# Altium PCB UAC_V1_1.PcbDoc
Units mm, origin at the board's own origin, x right, y up, seen from the top; angles counter-clockwise.
Board outline 33.91 x 48.01 mm, 4 copper layers (Top Layer, Int1, Int2, Bottom Layer), stack 1.369 mm thick; 71 components, 45 nets, 264 pads, 49 vias.
Unrouted connection lines stored in the file: 3.
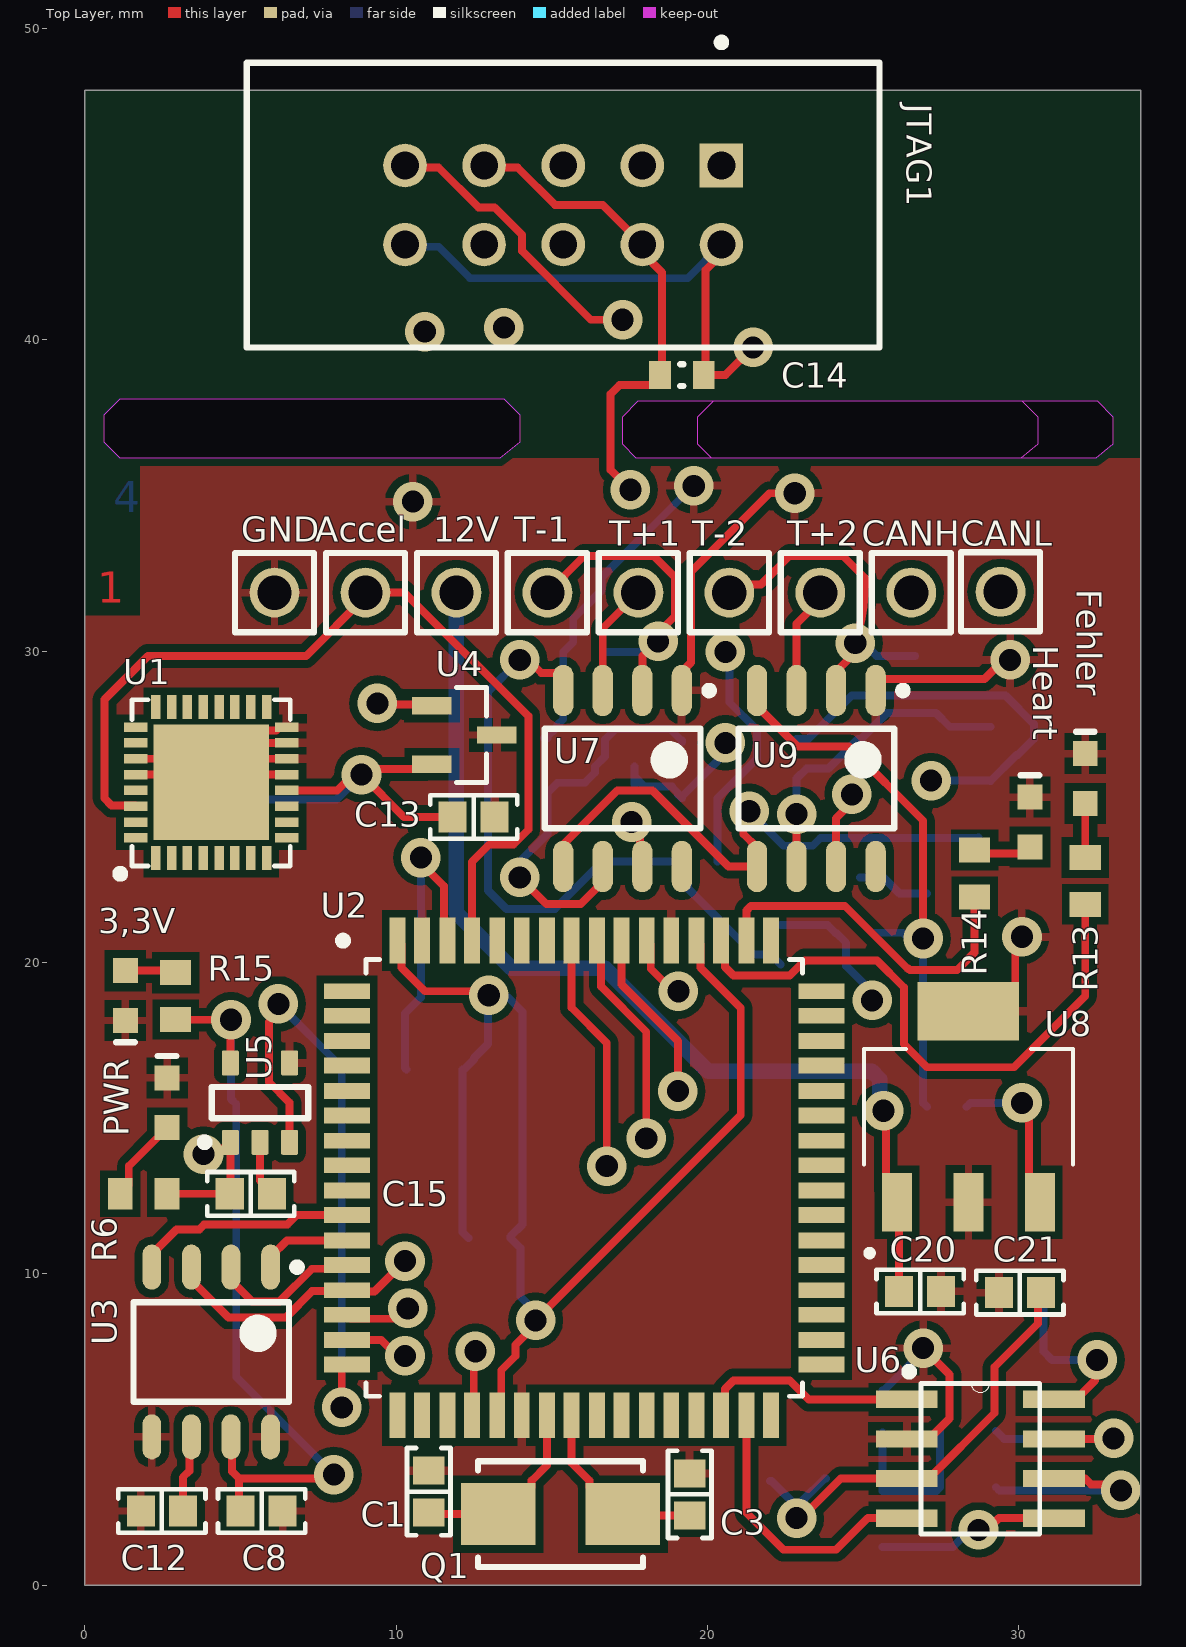
[diagram p0: Top Layer view]
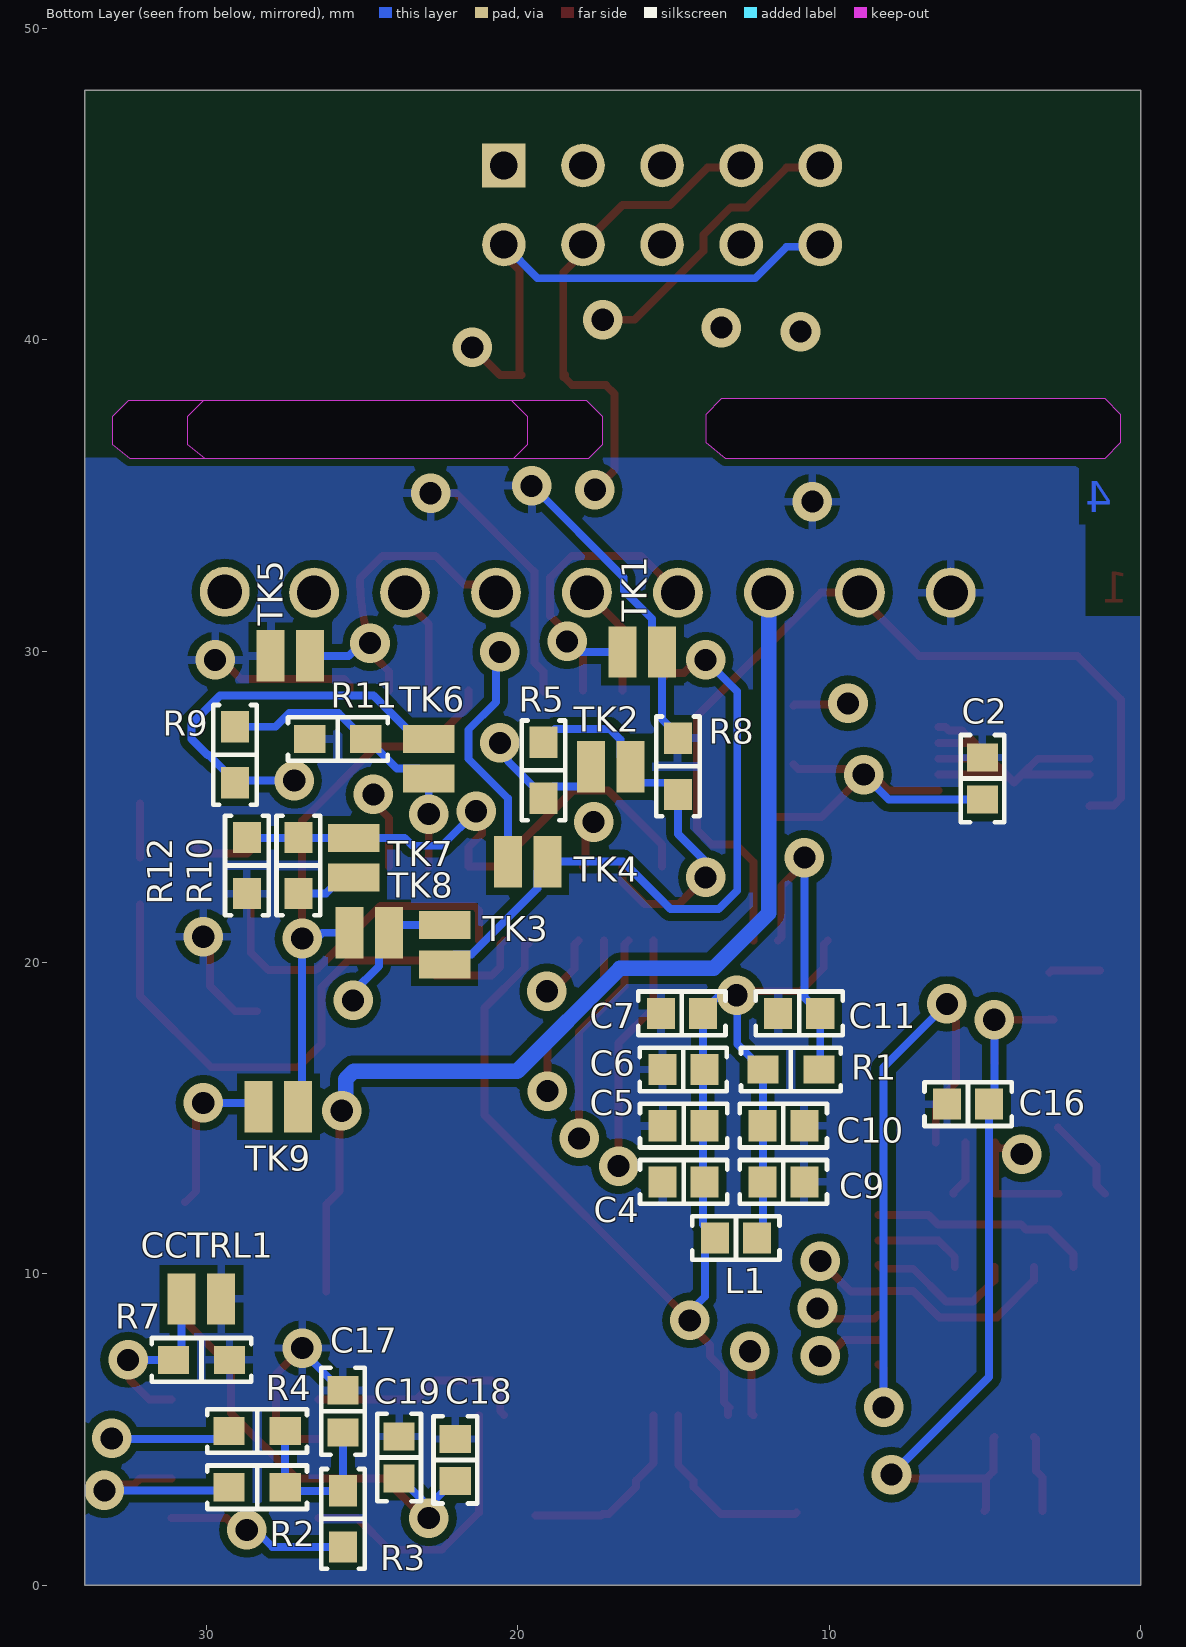
[diagram p1: Bottom Layer view, seen from below]
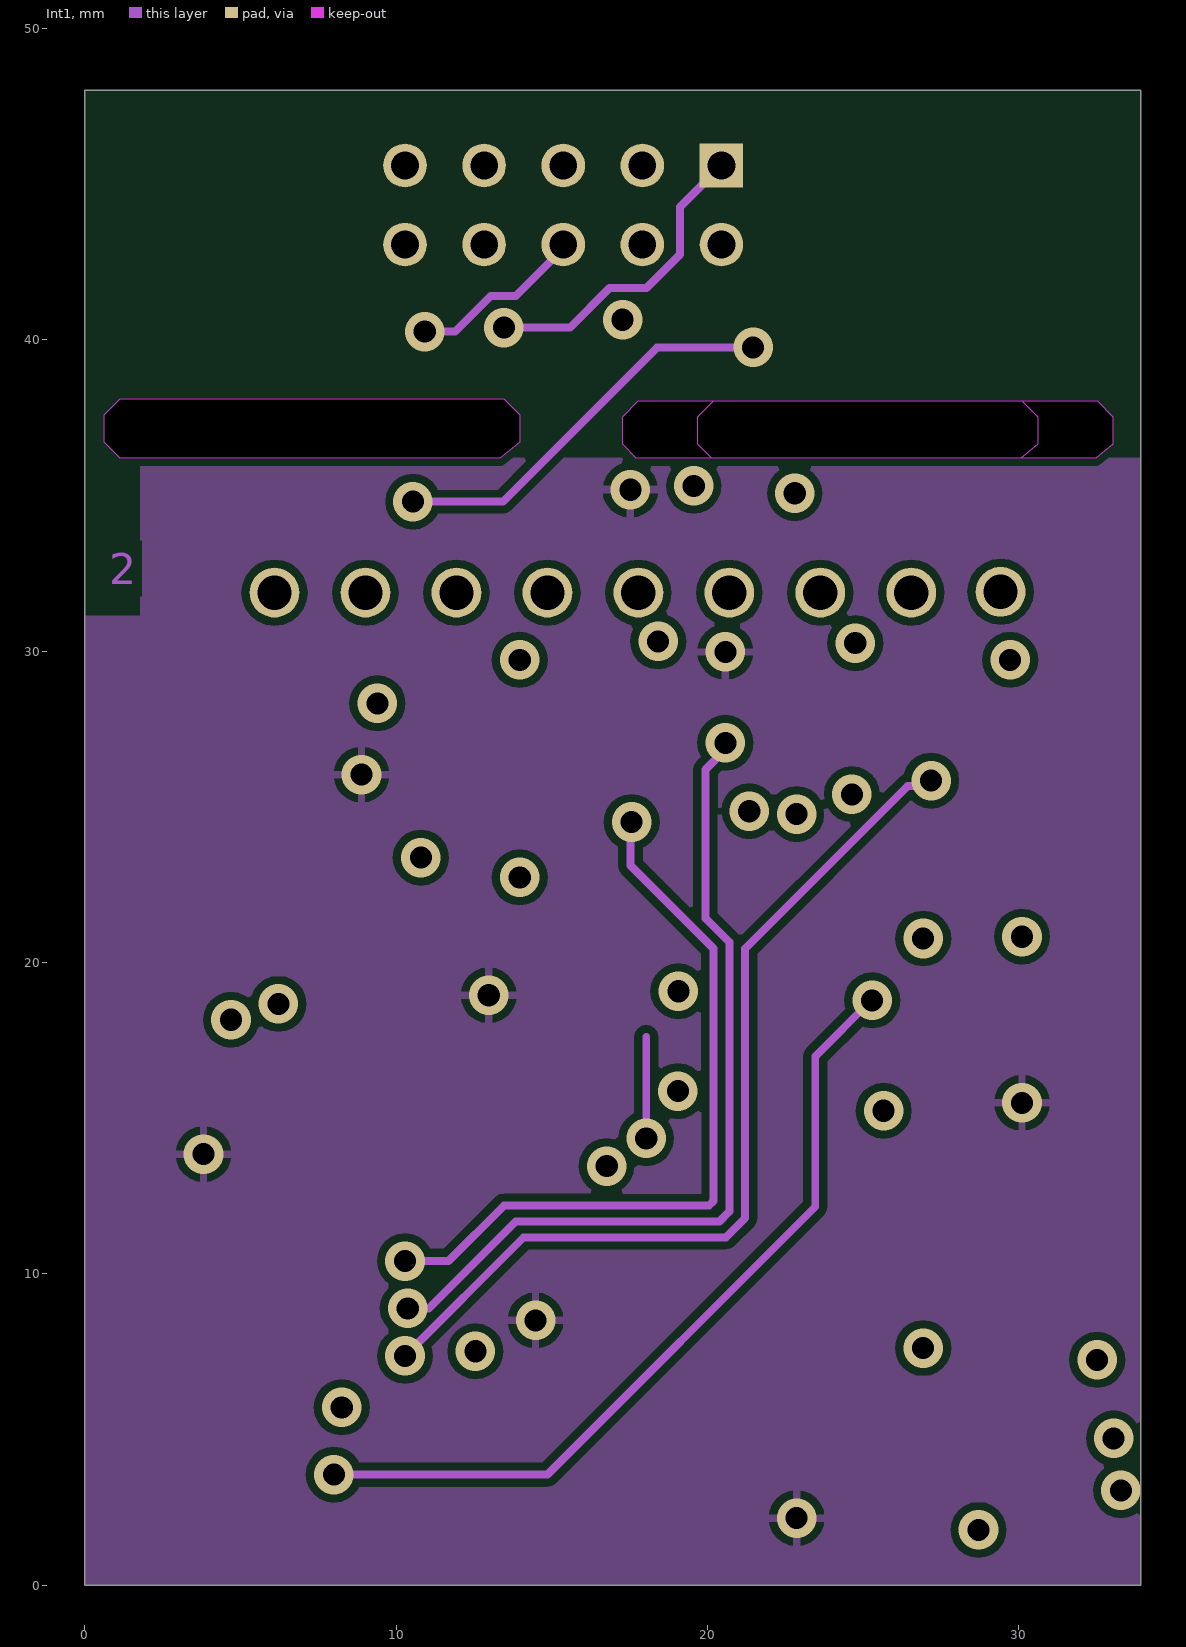
[diagram p2: Int1]
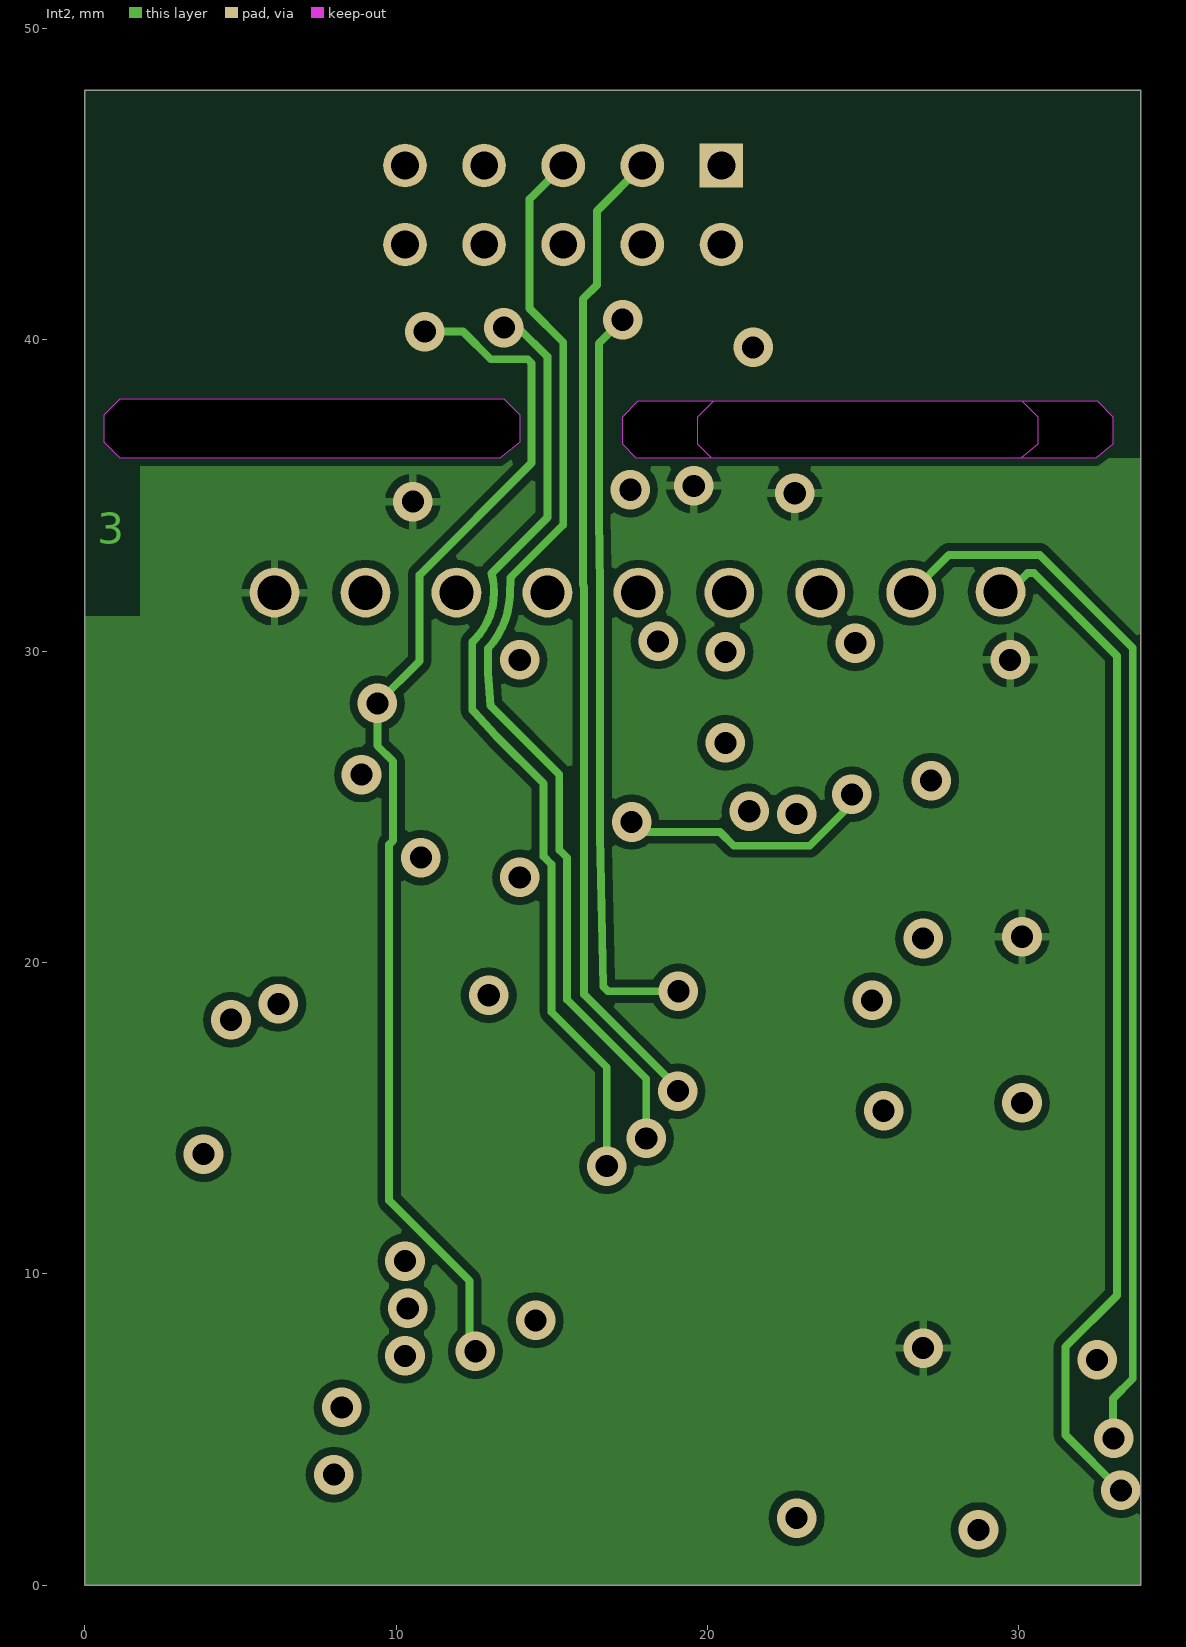
[diagram p3: Int2]
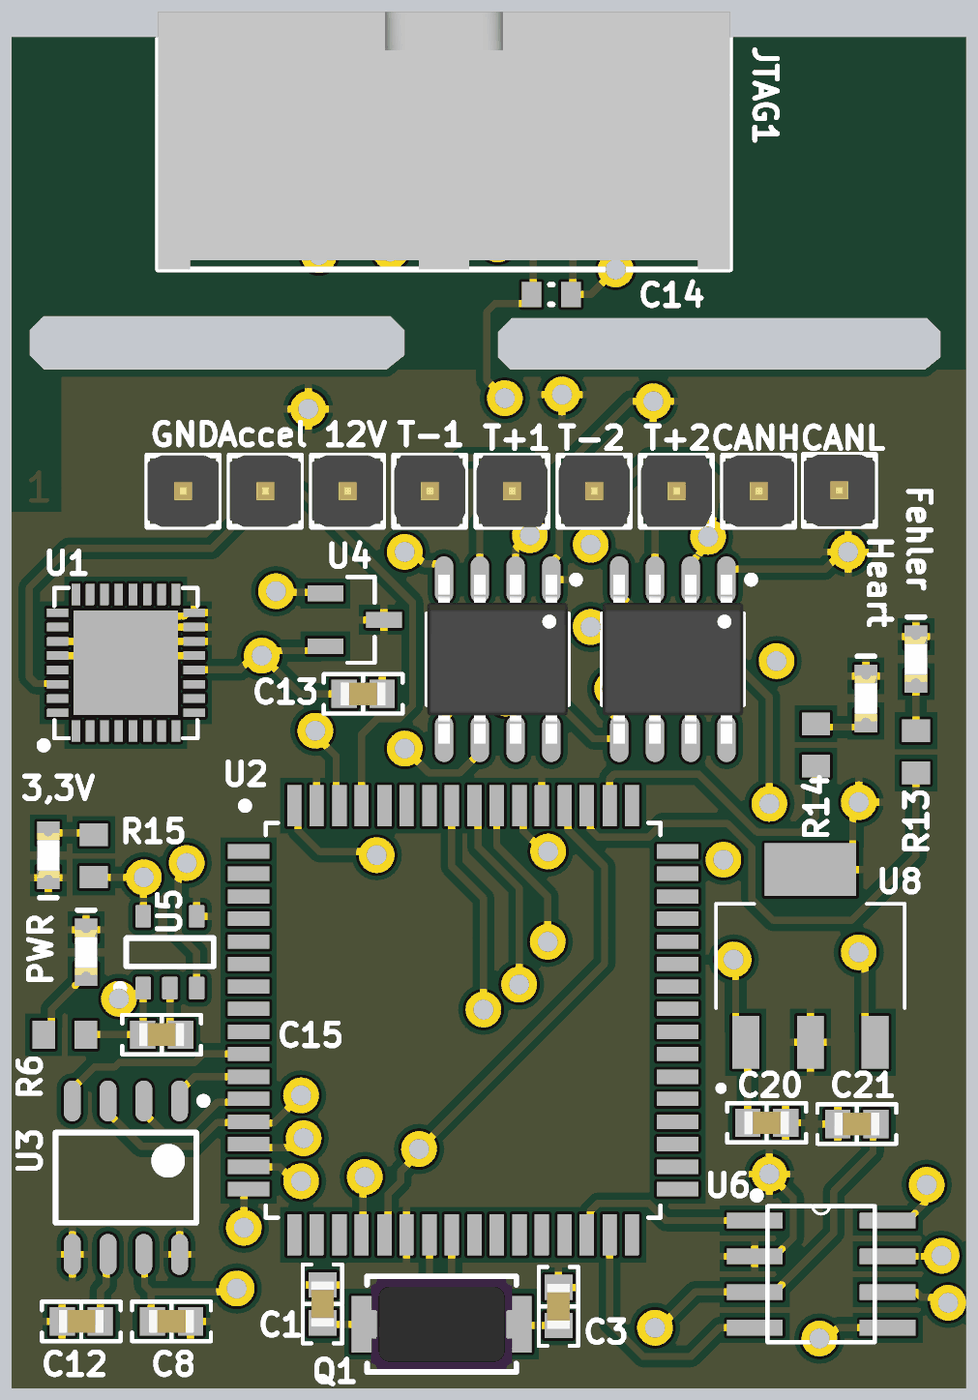
[diagram p4: 3D render of the assembled board from above, using the file's embedded part models]
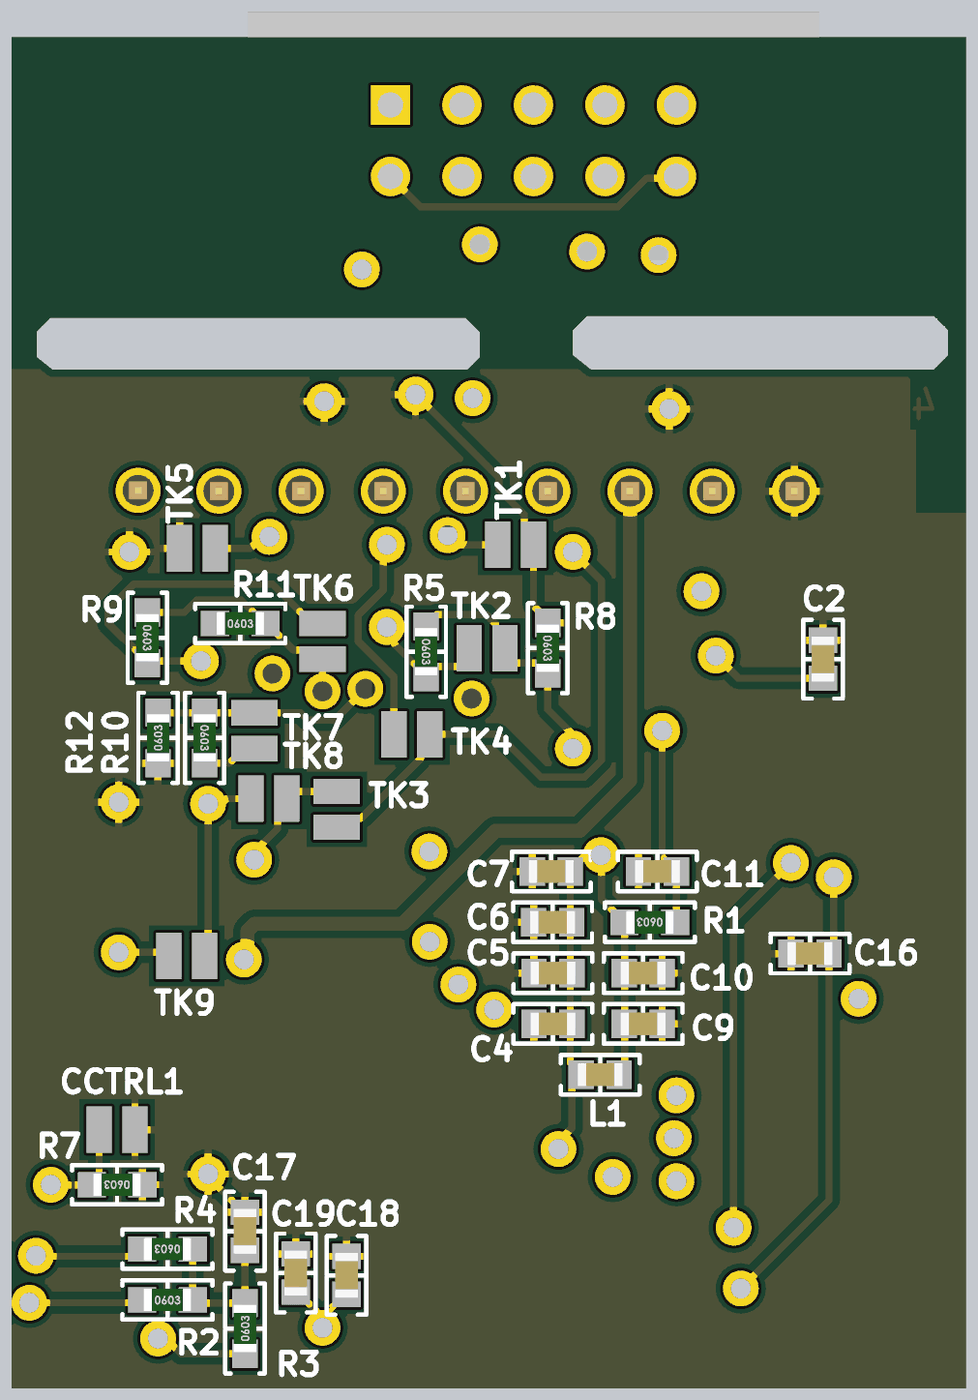
[diagram p5: 3D render of the assembled board from below, using the file's embedded part models]

## Layer stack, top to bottom
Top Solder: solder mask 0.0254, SM-001, Dk 4
Top Layer: signal copper 0.035
Dielectric 1: prepreg 0.1295, PP-017, Dk 4.3
Dielectric 2: prepreg 0.1295, PP-017, Dk 4.3
Int1: signal copper 0.035
Dielectric 3: core 0.7112, Core-039, Dk 4.8
Int2: signal copper 0.035
Dielectric 4: prepreg 0.1295, PP-017, Dk 4.3
Dielectric 5: prepreg 0.1295, PP-017, Dk 4.3
Bottom Layer: signal copper 0.035
Bottom Solder: solder mask 0.0254, SM-001, Dk 4

## Board outline
0,0 33.909,0 33.909,48.006 0,48.006
cut-out: 19.685,36.639 19.685,37.529 20.193,38.036 32.512,38.036 33.02,37.529 33.02,36.639 32.464,36.195 20.13,36.195
cut-out: 17.272,36.639 17.272,37.529 17.78,38.036 30.099,38.036 30.607,37.529 30.607,36.639 30.051,36.195 17.716,36.195
cut-out: 0.635,36.703 0.635,37.592 1.143,38.1 13.462,38.1 13.97,37.592 13.97,36.703 13.335,36.195 1.143,36.195

## Design rules (kind name [scope] priority, off if disabled: settings)
Clearance [All] p1: gap=0.254 ignorepadtopadclearanceinfootprint=FALSE except(0: Arc-Hole Track-Hole SMDPad-Hole THPad-Hole Via-Hole Fill-Hole Poly-Hole Region-Hole Text-Hole)
PolygonConnect [All] p1: connectstyle=Relief reliefconductorwidth=0.254 reliefentries=4 polygonreliefangle="90 Angle" airgapwidth=0.254
RoutingVias [All] p1: holewidth=0.711 width=1.27 viastyle="Through Hole" minholewidth=0.711 minwidth=1.27 maxholewidth=0.711 maxwidth=1.27
SolderMaskExpansion [All] p1: expansion=0.102 istentingtop=FALSE
Width [All] p1: maxlimit=0.254 minlimit=0.254 preferedwidth=0.254
30 further rules are at their usual default settings.

## Components (designator, comment, footprint, x,y, rotation, side; value= is the part's Value field where it differs from the comment)
3,3V "150060GS75000" 0603_A 1.306,18.938 r90 top
12V "61300111121" 61300111121 11.938,31.877 r90 top
Accel "61300111121" 61300111121 9.017,31.877 r90 top
C1 "SMD Capacitor" "CAP 0603/1608" 11.049,3.008 r270 top value=18pF
C2 "SMD Capacitor" "CAP 0603/1608" 5.08,25.908 r90 bottom value=1uF
C3 "SMD Capacitor" "CAP 0603/1608" 19.431,2.921 r270 top value=18pF
C4 "SMD Capacitor" "CAP 0603/1608" 14.676,12.955 r180 bottom value=1uF
C5 "SMD Capacitor" "CAP 0603/1608" 14.676,14.76 r180 bottom value=100nF
C6 "SMD Capacitor" "CAP 0603/1608" 14.686,16.564 r180 bottom value=1uF
C7 "SMD Capacitor" "CAP 0603/1608" 14.733,18.368 r180 bottom value=100nF
C8 "SMD Capacitor" "CAP 0603/1608" 5.683,2.387 r0 top value=0,1uF
C9 "SMD Capacitor" "CAP 0603/1608" 11.471,12.955 r180 bottom value=1uF
C10 "SMD Capacitor" "CAP 0603/1608" 11.471,14.76 r180 bottom value=100nF
C11 "SMD Capacitor" "CAP 0603/1608" 10.963,18.368 r0 bottom value=1uF
C12 "SMD Capacitor" "CAP 0603/1608" 2.479,2.387 r180 top value=1uF
C13 "SMD Capacitor" "CAP 0603/1608" 12.493,24.676 r0 top value=1uF
C14 "100nF 0603" CAPC0603(1608)100_L 19.177,38.862 r0 top value=100nF
C15 "SMD Capacitor 1uF" "CAP 0603/1608" 5.334,12.573 r180 top value=1uF
C16 "SMD Capacitor 1uF" "CAP 0603/1608" 5.542,15.452 r180 bottom value=1uF
C17 "SMD Capacitor" "CAP 0603/1608" 25.615,5.589 r90 bottom value=4,7u
C18 "SMD Capacitor" "CAP 0603/1608" 22.007,4.025 r270 bottom
C19 "SMD Capacitor" "CAP 0603/1608" 23.811,4.105 r270 bottom
C20 "SMD Capacitor" "CAP 0603/1608" 26.827,9.439 r180 top value=2u2
C21 "SMD Capacitor" "CAP 0603/1608" 30.032,9.399 r0 top value=1uF
CANH "61300111121" 61300111121 26.543,31.877 r90 top
CANL "61300111121" 61300111121 29.411,31.904 r90 top
CCTRL1 "SMD Jumper open" SMD-JUMPER-OPEN 30.159,9.196 r0 bottom
Fehler "150060GS75000" 0603_A 32.131,25.908 r270 top
GND "61300111121" 61300111121 6.096,31.877 r90 top
Heart "150060GS75000" 0603_A 30.353,24.511 r270 top
JTAG1 "5103309-1" TECO-5103309-1_V 15.367,44.323 r0 top
L1 "SMD Capacitor" "CAP 0603/1608" 12.995,11.151 r0 bottom value=100nH
PWR "150060GS75000" 0603_A 2.65,15.495 r270 top
Q1 "16M" "NDK NX5032GA" 15.281,2.287 r180 top
R1 "SMD Resistor" "STACKPOLE CSR0603" 11.232,16.564 r0 bottom value=100
R2 "SMD Resistor" "STACKPOLE CSR0603" 28.37,3.15 r180 bottom value="60 0603"
R3 "SMD Resistor" "STACKPOLE CSR0603" 25.615,2.135 r90 bottom value="300 0603"
R4 "SMD Resistor" "STACKPOLE CSR0603" 28.37,4.954 r0 bottom value="60 0603"
R5 "SMD Resistor" "STACKPOLE CSR0603" 19.177,26.173 r270 bottom value="10K 0603"
R6 "RC0603FR-07100RL" RESC1608X55X25ML10T15 1.893,12.573 r180 top
R7 "SMD Resistor" "STACKPOLE CSR0603" 30.159,7.24 r0 bottom
R8 "SMD Resistor" "STACKPOLE CSR0603" 14.859,26.3 r270 bottom value="18K 0603"
R9 "SMD Resistor" "STACKPOLE CSR0603" 29.083,26.67 r270 bottom value="10K 0603"
R10 "SMD Resistor" "STACKPOLE CSR0603" 27.047,23.115 r270 bottom value="10K 0603"
R11 "SMD Resistor" "STACKPOLE CSR0603" 25.781,27.178 r180 bottom value="18K 0603"
R12 "SMD Resistor" "STACKPOLE CSR0603" 28.702,23.114 r90 bottom value="18K 0603"
R13 "RC0603FR-07100RL" RESC1608X55X25ML10T15 32.131,22.618 r90 top
R14 "RC0603FR-07100RL" RESC1608X55X25ML10T15 28.575,22.86 r90 top
R15 "RC0603FR-07100RL" RESC1608X55X25ML10T15 2.921,18.923 r90 top
T+1 "61300111121" 61300111121 17.78,31.877 r0 top
T+2 "61300111121" 61300111121 23.622,31.877 r0 top
T-1 "61300111121" 61300111121 14.859,31.877 r0 top
T-2 "61300111121" 61300111121 20.701,31.877 r0 top
TK1 "SMD Jumper open" SMD-JUMPER-OPEN 16.002,29.972 r0 bottom
TK2 "SMD Jumper open" SMD-JUMPER-OPEN 17.018,26.289 r0 bottom
TK3 "SMD Jumper open" SMD-JUMPER-OPEN 22.352,20.574 r270 bottom
TK4 "SMD Jumper open" SMD-JUMPER-OPEN 19.685,23.241 r180 bottom
TK5 "SMD Jumper open" SMD-JUMPER-OPEN 27.305,29.845 r180 bottom
TK6 "SMD Jumper open" SMD-JUMPER-OPEN 22.86,26.543 r90 bottom
TK7 "SMD Jumper open" SMD-JUMPER-OPEN 25.273,23.368 r270 bottom
TK8 "SMD Jumper open" SMD-JUMPER-OPEN 24.765,20.955 r0 bottom
TK9 "SMD Jumper open" SMD-JUMPER-OPEN 27.686,15.367 r180 bottom
U1 "ADXL1001/2" PCBComponent_1 2.286,23.355 r90 top
U2 "AT90CAN128-16AI" *QFP80P1600X1600X120-64N 16.043,13.082 r0 top
U3 "AIS1120SXTR" "SOIC8; SOIC127P600X175-8N" 4.064,7.493 r270 top
U4 "MCP130T-450I/TT" *SOT95P237X112-3N 12.19,27.305 r270 top
U5 "TPS78330DDCT" DDC0005A_L 5.629,15.5 r90 top
U6 "MCP2551/2561" *SOIC127P600X175-8N 28.762,4.065 r0 top
U7 "MAX31855KASA+/MAX6675" SOIC8 17.272,25.908 r270 top value=Value
U8 "LT1118CST-5" *SOT230P700X180-4N 28.381,15.368 r90 top
U9 "MAX31855KASA+/MAX6675" SOIC8 23.495,25.908 r270 top value=Value

## Footprints (in the part's own frame and the unit in brackets; to place one, negate y for a bottom-side part, rotate by r counter-clockwise, add the part's x,y. Pads: shape width x height; smd on the part's side, far side on the other; paste and mask are expansions set on the pad)
0603_A [mm] "Chip LED, 2-Leads, Body 1.6x0.8mm, IPC Medium Density"
  rect 0.8x0.8 smd: 1(-0.8,0) 2(0.8,0)
  silkscreen extent -1.5,-0.3 -1.5,0.3, body extent -0.8,-0.4 0.8,0.4, height 0.7
61300111121 [mm] "1pins, 1 row, straight, gold plating"
  round 1.6 hole 1.1: 1(0,0)
  silkscreen extent -1.27,-1.27 1.27,1.27, body extent -1.27,-1.27 1.27,1.27, height 8.57
*QFP80P1600X1600X120-64N [mil]
  rect 58x20 smd: 1(-300,236) 2(-300,205) 3(-300,173) 4(-300,142) 5(-300,110) 6(-300,79) 7(-300,47) 8(-300,16) 9(-300,-16) 10(-300,-47) 11(-300,-79) 12(-300,-110) 13(-300,-142) 14(-300,-173) 15(-300,-205) 16(-300,-236) 33(300,-236) 34(300,-205) 35(300,-173) 36(300,-142) 37(300,-110) 38(300,-79) 39(300,-47) 40(300,-16) 41(300,16) 42(300,47) 43(300,79) 44(300,110) 45(300,142) 46(300,173) 47(300,205) 48(300,236)
  rect 20x58 smd: 17(-236,-300) 18(-205,-300) 19(-173,-300) 20(-142,-300) 21(-110,-300) 22(-79,-300) 23(-47,-300) 24(-16,-300) 25(16,-300) 26(47,-300) 27(79,-300) 28(110,-300) 29(142,-300) 30(173,-300) 31(205,-300) 32(236,-300) 49(236,300) 50(205,300) 51(173,300) 52(142,300) 53(110,300) 54(79,300) 55(47,300) 56(16,300) 57(-16,300) 58(-47,300) 59(-79,300) 60(-110,300) 61(-142,300) 62(-173,300) 63(-205,300) 64(-236,300)
  silkscreen extent -310,-276 276,305, body extent -270,-270 270,270, height 30
*SOIC127P600X175-8N [mil]
  rect 78x22 smd: 1(-93,75) 2(-93,25) 3(-93,-25) 4(-93,-75) 5(93,-75) 6(93,-25) 7(93,25) 8(93,75)
  silkscreen extent -95,-95 75,115, body extent -75,-95 75,95, height 80
*SOT95P237X112-3N [mil]
  rect 22x50 smd: 1(-37,-41) 2(37,-41) 3(0,41)
  silkscreen extent -60,-10 60,28, body extent -60,-25 60,25, height 50
*SOT230P700X180-4N [mm]
  rect 1.88x0.96 smd: 1(-3.065,2.3) 2(-3.065,0) 3(-3.065,-2.3)
  rect 1.88x3.26 smd: 2(3.065,0)
  silkscreen extent -4.8,-3.35 1.85,3.35, body extent -1.91,-3.43 1.91,3.43, height 1.27
"CAP 0603/1608" [mm] "Chip Capacitor, 2-Leads, Body 1.60x0.80mm, IPC Medium Density"
  rect 0.9x1 smd: 1(-0.675,0) 2(0.675,0)
  silkscreen extent -1.4,-0.7 1.4,0.7, body extent -0.8,-0.41 0.8,0.41, height 0.82
CAPC0603(1608)100_L [mm] "Chip Capacitor, Body 1.6x0.8mm, Height 1.0mm, IPC High Density"
  rect 0.7x0.9 smd: 1(-0.7,0) 2(0.7,0)
  silkscreen extent -0.05,-0.35 0.05,0.35, body extent -0.87,-0.47 0.88,0.48, height 1
DDC0005A_L [mm] "SOT23, 5-Leads, Body 3.05x1.75mm, Pitch 0.95mm, IPC High Density"
  rrect18% 0.8x0.55 smd: 1(-1.275,0.95) 2(-1.275,0) 3(-1.275,-0.95) 4(1.275,-0.95) 5(1.275,0.95)
  silkscreen extent -1.4,-1.55 0.5,1.9, body extent -0.88,-1.52 0.87,1.53, height 1.1
"NDK NX5032GA" [mm] "Crystal, 2-Leads, Body 5.00x3.20mm, IPC Medium Density"
  rect 2.4x2 smd: 1(-2,0) 2(2,0)
  silkscreen extent -2.65,-1.7 2.65,1.7, body extent -2.5,-1.6 2.5,1.6, height 1.2
PCBComponent_1 [mil]
  rect 30x12 smd: 1(0,0) 2(0,-20) 3(0,-40) 4(0,-60) 5(0,-80) 6(0,-100) 7(0,-120) 8(0,-140) 17(191,-140) 18(191,-120) 19(191,-100) 20(191,-80) 21(191,-60) 22(191,-40) 23(191,-20) 24(191,0)
  rect 12x30 smd: 9(25.5,-165.5) 10(45.5,-165.5) 11(65.5,-165.5) 12(85.5,-165.5) 13(105.5,25.5) 13(105.5,-165.5) 13(125.5,25.5) 13(125.5,-165.5) 15(145.5,-165.5) 16(165.5,-165.5) 25(165.5,25.5) 26(145.5,25.5) 29(85.5,25.5) 30(65.5,25.5) 31(45.5,25.5) 32(25.5,25.5)
  rect 146x146 smd: 13(95.5,-70)
  silkscreen extent -25,-170 200,50, body extent -7,-167 198,28, height 10
RESC1608X55X25ML10T15 [mm] "Chip Resistor, 2-Leads, Body 1.60x0.80mm, IPC Low Density"
  rect 0.8x1 smd: 1(-0.75,0) 2(0.75,0)
  body extent -0.85,-0.45 0.85,0.45, height 0.55
SMD-JUMPER-OPEN [mm] "Jumper, SMD"
  rect 0.9x1.65 smd: 1(-0.635,0) 2(0.635,0)
SOIC8 [mm] "SOIC, 8-Leads, Body 4,90x3,90mm, Pitch 1,27mm, IPC Low Density"
  oval 1.65x0.65 smd: 1(-2.825,1.905) 2(-2.825,0.635) 3(-2.825,-0.635) 4(-2.825,-1.905) 5(2.825,-1.905) 6(2.825,-0.635) 7(2.825,0.635) 8(2.825,1.905)
  silkscreen extent -2.95,-2.5 1.6,2.91, body extent -3,-2.5 3,2.5, height 1.75
"SOIC8; SOIC127P600X175-8N" [mm] "SOIC, 8-Leads, Body 4,90x3,90mm, Pitch 1,27mm, IPC Medium Density"
  oval 1.45x0.6 smd: 1(-2.725,1.905) 2(-2.725,0.635) 3(-2.725,-0.635) 4(-2.725,-1.905) 5(2.725,-1.905) 6(2.725,-0.635) 7(2.725,0.635) 8(2.725,1.905)
  silkscreen extent -2.85,-2.5 1.6,2.88, body extent -2,-2.5 2,2.5, height 1.75
"STACKPOLE CSR0603" [mm] "Chip Resistor, 2-Leads, Body 1.60x0.80mm, IPC Medium Density"
  rect 1x0.9 smd: 1(-0.9,0) 2(0.9,0)
  silkscreen extent -1.6,-0.7 1.6,0.7, body extent -0.85,-0.4 0.85,0.4, height 0.45
TECO-5103309-1_V [mm] "Male Header, 10-Leads, Body 20.32x9.144mm, Pitch 2.54mm"
  rect 1.4x1.4 hole 0.889: 1(5.08,1.27)
  round 1.4 hole 0.889: 2(5.08,-1.27) 3(2.54,1.27) 4(2.54,-1.27) 5(0,1.27) 6(0,-1.27) 7(-2.54,1.27) 8(-2.54,-1.27) 9(-5.08,1.27) 10(-5.08,-1.27)
  silkscreen extent -10.16,-4.57 10.16,5.35, body extent -10.16,-4.57 10.16,4.57, height 9.85

## Part data
3,3V Fehler Heart PWR: library part CMP-1426-00002-1, "SMD mono-color Chip LED, WL-SMCW, Green", Color=Green, Manufacturer="Wuerth Elektronik", ComponentLink1Description="Manufacturer URL", ComponentLink1URL=http://www.we-online.com, ComponentLink2Description=Datasheet, ComponentLink2URL=http://katalog.we-online.com/led/datasheet/150060GS75000.pdf, PackageReference=0603_A, PartNumber=150060GS75000
12V Accel CANH CANL GND T+1 T+2 T-1 T-2: "WR-PHD 2.54 mm THT Pin Header, 1p", Rated Current="3 A", Withstanding Voltage="500 VAC", Working Voltage="250 VAC", ComponentLink1Description=Manufacturer, ComponentLink1URL=http://www.we-online.de, ComponentLink2Description=Datasheet, ComponentLink2URL=http://katalog.we-online.de/em/datasheet/6130xx11121.pdf, Part Number=61300111121, Pin Number=1, Pitch="2.54 mm", Published Date="Aug 2017", Publisher="Wurth Elektronik"
C1 C2 C3 C4 C5 C6 C7 C8 C9 C10 C11 C12 C13 C17 C18 C19 C20 C21 L1: "Capacitor with multiple Footprints"
C14: library part CMP-1035-02579-1, "CAP 100nF 10V ±5% 0603 (1608 Metric) Thickness 1mm SMD", Case-EIA=0603, Case-Metric=1608, Rated Voltage="10 V", Tolerance=Â±5%, Max Thickness="1 mm", Technology=SMT
C15 C16: library part "SMD Capacitor", "Capacitor with multiple Footprints"
JTAG1: library part CMP-2000-07502-1, "Male Header, Pitch 2.54 mm, 2 x 5 Position, Height 9.855 mm, Tail Length 3.048 mm, -65 to 105 degC, RoHS, Tube", Colour=Black, Current Rating=1A, Flammability Rating=UL94V-0, Insulation Resistance=5GR, Manufacturer="TE Connectivity", Max Operating Temperature=105degC, Min Operating Temperature=-65degC, Package Description="Male Header, Pitch 2.54 mm, 2 x 5 Position, Height 9.855 mm, Tail Length 3.048 mm", Package Quantity=35, Board Standoff=Yes(With), Body Material=Thermoplastic, Connector System=Wire-to-Board, Connector Type=Header, Contact Gender=Male, Contact Material=CopperAlloy, Contact Mating Length=0.24inch, Contact Plating=Gold, Contact Shape=Square, Datasheet URL=http://www.te.com/commerce/DocumentDelivery/DDEController?Action=showdoc&DocId=Customer+Drawing%7F5103309%7FE1%7Fpdf%7FEnglish%7FENG_CD_5103309_E1.pdf%7F5103309-1, Datasheet Version="Rev. E1, 03/2011", Depth=9.14mm, ELV=Compliant, Gender=Male, Height=8.813mm, Housing Colour=Black, Housing Material=PBT, Lead Free=LeadFree, Length=0.8inch, Manufacturer URL=http://www.te.com/, Mating Alignment=Yes(With), Mating Connector Lock=No(Without), Mating Retention=No(Without), Max Current Rating=1A, Mount=ThroughHole, Mounting Technology=ThroughHole, Number of Contacts=10, Number of Positions=10, Number of Rows=2, Orientation=Straight, Package Reference=5103309-1, Packaging=Rail/Tube, Panel Mount Retention=No(Without), PCB Mount Alignment=No(Without), PCB Mount Retention=Without, PCB Mounting Orientation=Vertical, Pitch=2.54mm, REACH SVHC=NoSVHC, RoHSCompliant=True, Row Spacing=2.54mm, Shrouded=Yes(With), Shrouded End Dimension=3.81mm, Termination=ThroughHole, Termination Post Length=0.12inch
Q1: library part "16 MHz Quartz", "16 MHz Quartz"
R1 R2 R3 R4 R5 R7 R8 R9 R10 R11 R12: "Resistor with multiple footprints"
R6 R13 R14 R15: library part CMP-2100-03663-1, "Chip Resistor, 100 Ohm, +/- 1%, 0.1 W, -55 to 155 degC, 0603 (1608 Metric), RoHS, Tape and Reel", Case Code (Imperial)=0603, Case Code (Metric)=1608, Manufacturer=Yageo, Max Operating Temperature=155degC, Min Operating Temperature=-55degC, Package Description="2-Pin Surface Mount Device, Body 1.6 x 0.8 mm", Power Rating=100mW, Resistance=100Ohm, Temperature Coefficient=100ppm/degreesC, Tolerance=1%, Voltage Rating=50V, Case/Package=0603, Composition=ThickFilm, Datasheet URL=http://www.yageo.com/NewPortal/yageodocoutput?fileName=/pdf/R-Chip/PYu-RC_Group_51_RoHS_L_5.pdf, Datasheet Version="Rev. 5, 10/2016", Depth=0.8mm, Height=0.45mm, Lead Free=LeadFree, Length=1.6mm, Manufacturer URL=http://www.yageo.com/, Military Standard=Not, Number of Pins=2, Package Reference=0603, Packaging=TapeandReel, REACH SVHC=Unknown, RoHSCompliant=true, Termination=SMD/SMT, Voltage Rating (DC)=50V, Width=0.8mm
U2: "Ic Mcu 8bit 128kb Flash 64tqfp", Package="TQFP-64 Microchip", Availability=Unavailable, MF=Microchip, MP=AT90CAN128-16AI, Price=None, SnapEDA_Link=https://www.snapeda.com/parts/AT90CAN128-16AI/Microchip/view-part/?ref=snap
U4: "System Supervisors - Power Supply Monitors with Reset Generators Open Drain Low", Package="SOT-23-3 Microchip", Availability=Unavailable, MF=Microchip, MP=MCP120T-450I/TT, Price=None, SnapEDA_Link=https://www.snapeda.com/parts/MCP120T-450I/TT/Microchip/view-part/?ref=snap
U5: library part CMP-0394-01077-2, "Single Output LDO, 150 mA, Fixed 3 V Output, 2.2 to 5.5 V Input, with Ultra-Low IQ, 5-pin SOT (DDC), -40 to 105 degC, Green (RoHS & no Sb/Br)", Manufacturer="Texas Instruments", Rating=Catalog, Accuracy(%)=3, Code_JEDEC=MO-193, ComponentLink1Description="Manufacturer URL", ComponentLink1URL=http://www.ti.com/, ComponentLink2Description=Datasheet, ComponentLink2URL=http://www.ti.com/general/docs/lit/getliterature.tsp?genericPartNumber=TPS78330&fileType=pdf, ComponentLink3Description="Package Specification", ComponentLink3URL=http://www.ti.com/litv/pdf/mpds123d, DatasheetVersion=SBVS133, Eco-Plan="Green (RoHS & no Sb/Br)", Fixed Output Options(V)=3, Iout(Max)(A)=0.15, Iq(Typ)(mA)=0.0005, Mounting Technology="Surface Mount", PackageDescription="5-Pin Plastic Small Outline, Body 2.9 x 1.6 mm, 0.95 mm Pitch", PackageReference=DDC0005A, PackageVersion=4204403-2/E, PartNumber=TPS78330DDCT, SubFamily="Single Channel LDO", Vdo(Typ)(mV)=130, Vin(Max)(V)=5.5, Vin(Min)(V)=2.2, Vout Adj(Max)(V)=3, Vout Adj(Min)(V)=3
U6: library part MCP2551-I/SN, "MCP2551 Series 5.5 V 1 Mb/s Surface Mount High-Speed CAN Transceiver - SOIC-8", Package="SOIC-8 Microchip", Availability=Unavailable, MF=Microchip, MP=MCP2551-I/SN, Price=None, SnapEDA_Link=https://www.snapeda.com/parts/MCP2551-I/SN/Microchip/view-part/?ref=snap
U7 U9: library part MAX31855KASA+, "No Description Available", Built_By=EMA_UL_Team, Copyright="Copyright (C) 2018 Accelerated Designs. All rights reserved", Manufacturer_Part_Number=MAX31855KASA+, RefDes=RefDes, Type=DEV, Vendor="Maxim Integrated Products"
U8: "or UA78M if used topdown (in and out changed)"

## Via types
v1: diameter 1.27, hole 0.711, Top Layer to Bottom Layer, 49 vias

## Nets (pads, with @x,y where several pads share a name; then routed paths per layer and width w, separated by ;. In a path a pad name is that pad's centre, name@x,y a point inside that pad or via, vN(x,y) a via of type N, cw(c..) or ccw(c..) an arc to the next point about the centre after c; other vN are vias at no path point)
3,3V: C8.1 C16.2 R15.1 TK3.1 TK8.1 U3.7 U5.5 | length 56
  Top Layer w0.254: R15.1 2.806,18.173 2.794,18.161 v1(4.699,18.161) 4.689,18.151 4.689,16.785 U5.5 ; U3.7 4.731,4.736 4.731,3.662 4.961,3.432 ; C8.1 4.961,2.434 4.961,3.432 ; v1(8.001,3.556) 7.877,3.432 4.961,3.432
  Int1 w0.254: v1(8.001,3.556) 14.859,3.556 23.461,12.158 23.461,16.984 25.262,18.785 v1(25.288,18.785)
  Bottom Layer w0.254: v1(4.699,18.161) 4.699,15.621 C16.2 4.867,6.69 v1(8.001,3.556) ; TK3.1 23.849,21.209 24.116,20.941 TK8.1 24.453,20.632 24.453,19.886 v1@25.289,19.05 ; v1(25.288,18.785) v1@25.288,19.049
"3,3V EN": U2.16 U5.3 | length 20.1
  Top Layer w0.254: v1(6.223,18.669) 6.223,18.394 5.923,18.094 5.923,16.155 6.579,15.499 U5.3 ; v1(8.255,5.715) 8.255,6.961 8.382,7.088 U2.16
  Bottom Layer w0.254: v1(6.223,18.669) 8.255,16.637 v1(8.255,5.715)
+5V: C2.1 C4.2 C5.2 C6.2 C7.2 C9.1 C10.1 C13.1 C14.1 C15.2 C18.2 C19.2 C21.2 JTAG1.4 JTAG1.7 L1.1 L1.2 R1.2 R6.1 TK4.1 TK9.1 U1.12 U2.21 U2.52 U2.64 U4.2 U5.1 U6.3 U8.3 | length 104.9
  Top Layer w0.254: R6.1 C15.2 4.679,12.593 U5.1@4.679,14.183 ; v1(3.817,13.845) 4.007,14.035 4.531,14.035 U5.1@4.679,14.183 ; U5.1 U5.1@4.679,14.183 ; U1.12 8.107,25.527 8.615,26.035 v1(8.89,26.035) ; U2.64 10.176,20.575 10.176,19.833 10.931,19.078 12.844,19.078 v1(12.974,18.948) ; U4.2 10.996,26.213 9.068,26.213 v1(8.89,26.035) ; C13.1 10.249,24.676 v1(8.89,26.035) ; JTAG1.7 12.897,45.523 13.908,45.523 15.108,44.323 16.637,44.323 JTAG1.4 17.907,42.794 18.542,42.159 C14.1@18.542,38.797 ; U2.21 13.249,5.674 13.208,5.715 13.376,5.883 13.376,6.907 13.83,7.36 13.83,7.72 14.478,8.368 v1(14.478,8.509) 21.068,15.099 21.068,18.542 19.777,19.833 19.777,20.575 U2.52 19.65,20.609 U2.52@19.685,20.574 ; v1(17.526,35.179) 16.891,35.814 16.891,38.258 17.172,38.539 18.254,38.539 18.477,38.762 C14.1 ; v1(22.86,2.159) 23.008,2.159 24.279,3.43 U6.3 26.415,3.43 26.416,3.429 27.109,3.429 29.21,5.53 29.21,7.007 30.607,8.404 30.607,9.3 C21.2 ; v1(30.099,15.494) 30.099,15.219 30.328,14.99 30.328,12.656 U8.3
  Bottom Layer w0.254: C2.1 8.088,25.233 v1(8.89,26.035) ; L1.1 12.132,11.339 R1.2 12.182,16.564 12.505,16.887 12.505,16.937 12.952,17.384 12.952,18.57 12.974,18.591 v1(12.974,18.948) ; v1@13.017,19.013 13.147,18.883 13.593,18.883 14.058,18.418 C7.2 14.058,11.589 13.67,11.201 L1.2 13.993,10.828 13.993,9.269 14.478,8.784 v1(14.478,8.509) ; TK4.1 20.32,25.273 21.59,26.543 21.59,27.472 20.701,28.361 20.701,29.845 v1(20.574,29.972) ; C18.2 22.057,3.35 22.666,2.742 22.666,2.353 v1(22.86,2.159) 23.054,2.353 23.054,2.724 23.761,3.43 C19.2 ; TK9.1 28.448,15.494 v1(30.099,15.494)
+12V: 12V.1 C20.2 U8.1 | length 33.2
  Top Layer w0.254: v1(25.654,15.24) 25.728,15.166 25.728,12.656 U8.1 26.152,12.232 C20.2
  Bottom Layer w0.254: v1@25.527,15.367 v1(25.654,15.24)
  Bottom Layer w0.5: 12V.1 11.938,21.59 13.716,19.812 16.718,19.812 20.02,16.51 25.273,16.51 25.527,16.256 v1@25.527,15.367
ACC_Analog: Accel.1 U1.30 U2.61 | length 29.5
  Top Layer w0.254: U1.30 1.613,25.044 0.864,25.044 0.635,25.273 0.635,28.448 2.032,29.845 7.112,29.845 9.017,31.75 Accel.1 10.268,31.877 12.365,29.78 12.384,29.78 14.247,27.917 14.247,24.266 13.776,23.795 13,23.795 12.436,23.231 U2.61
CANH: CANH.1 R4.2 U6.7 | length 40.6
  Top Layer w0.254: v1(33.04,4.719) 33.021,4.7 U6.7@31.124,4.7 ; U6.7 30.989,4.7 U6.7@31.124,4.7
  Int2 w0.254: CANH.1 27.751,33.085 30.669,33.085 33.655,30.099 33.655,6.634 33.02,5.999 33.02,4.739 v1(33.04,4.719)
  Bottom Layer w0.254: R4.2 29.525,4.699 33.02,4.699 v1(33.04,4.719)
CANL: CANL.1 R2.1 U6.6 | length 39.7
  Top Layer w0.254: U6.6 31.125,3.429 32.131,3.429 32.318,3.242 33.08,3.242 v1(33.274,3.048)
  Int2 w0.254: CANL.1 29.68,31.904 30.279,32.503 30.489,32.503 33.147,29.845 33.147,9.311 31.496,7.66 31.496,4.826 v1(33.274,3.048)
  Bottom Layer w0.254: R2.1 29.372,3.048 v1(33.274,3.048)
CS_ACC: U2.10 U3.4 | length 7.2
  Top Layer w0.254: U3.4 2.159,10.643 2.946,11.43 3.683,11.43 3.837,11.584 6.509,11.584 6.813,11.889 U2.10
CS_TYPK_1: R5.2 TK2.2 U2.14 | length 34.4
  Top Layer w0.254: U2.14 8.55,8.561 10.212,8.561 10.377,8.726 v1(10.377,8.893)
  Int1 w0.254: v1(10.377,8.893) 10.538,8.893 10.541,8.89 11.049,8.89 13.843,11.684 20.382,11.684 20.701,12.003 20.701,20.657 19.939,21.419 19.939,26.199 20.574,26.834 v1(20.574,27.051)
  Bottom Layer w0.254: TK2.2@17.653,25.723 TK2.2@17.653,25.908 ; TK2.2 17.653,25.969 17.976,25.646 18.854,25.646 R5.2@19.177,25.323 ; R5.2@19.05,25.4 R5.2 R5.2@19.177,25.323 ; v1(20.574,27.051) 20.447,27.051 20.322,26.926 20.322,26.468 R5.2@19.177,25.323
CS_TYPK_2: R9.2 TK6.2 U2.15 | length 44.7
  Top Layer w0.254: U2.15@8.382,7.874 8.383,7.875 U2.15 9.524,7.875 10.033,7.366 v1(10.287,7.366)
  Int1 w0.254: v1(10.287,7.366) 14.097,11.176 20.592,11.176 21.209,11.793 21.209,20.447 26.425,25.663 27.002,25.663 v1(27.178,25.839)
  Bottom Layer w0.254: TK6.2 23.235,27.178 24.632,28.575 29.567,28.575 30.48,27.662 30.48,27.178 29.963,26.661 29.924,26.661 29.083,25.82 29.064,25.839 v1(27.178,25.839)
Fehler: R13.1 U2.51 | length 19.2
  Top Layer w0.254: U2.51 20.564,20.575 20.564,19.859 20.838,19.585 22.642,19.585 23.123,20.066 25.444,20.066 26.305,19.205 26.305,17.383 27.051,16.637 29.845,16.637 32.131,18.923 R13.1
GND: 3,3V.1 C1.1 C2.2 C3.1 C4.1 C5.1 C6.1 C7.1 C8.2 C9.2 C10.2 C11.2 C12.2 C13.2 C14.2 C16.1 C17.2 C18.1 C19.1 C20.1 C21.1 CCTRL1.1 Fehler.1 GND.1 Heart.1 JTAG1.2 JTAG1.10 PWR.1 R7.1 R8.1 R11.1 R12.1 TK1.1 TK5.1 U1.13 U1.15 U1.16 U2.22 U2.53 U2.63 U3.5 U3.8 U4.3 U5.4 U6.2 U7.1 U8.2 U9.1 | length 76.5
  Top Layer w0.254: U1.13@1.638,26.035 U1.13@3.81,26.035 ; U1.13@1.638,26.543 3.302,26.543 U1.13@3.81,26.035 ; U1.13@6.49,26.035 U1.13@4.318,26.035 ; U1.13@6.49,26.543 U1.13@4.826,26.543 ; U1.15 U1.13@5.334,27.051 ; U1.16 6.267,27.559 6.152,27.445 5.728,27.445 U1.13@5.334,27.051 ; U7.1@19.177,28.702 U7.1 19.177,29.34 19.469,29.632 19.469,32.55 21.987,35.068 v1(22.801,35.068) ; C14.2 C14.2@19.942,38.862 ; JTAG1.2 20.447,42.743 19.942,42.238 C14.2@19.942,38.862 ; v1(21.463,39.751) 20.574,38.862 C14.2@19.942,38.862 ; U9.1 25.4,28.923 25.583,29.106 28.893,29.106 29.505,29.718 v1(29.718,29.718) ; U6.2 27.111,4.7 27.771,5.361 27.771,6.773 v1(26.924,7.62) ; U8.2@28.381,18.433 29.071,18.433 29.884,19.246 29.884,20.338 30.099,20.553 v1(30.099,20.828) ; U1.13@3.81,26.035 4.064,25.781 U1.13@4.318,26.035 ; U1.13@4.318,26.035 U1.13@4.826,26.543 ; U1.13@4.826,26.543 U1.13@5.334,27.051
  Int1 w0.254: v1(10.541,34.798) 13.431,34.798 18.384,39.751 v1(21.463,39.751)
  Bottom Layer w0.254: JTAG1.10 10.357,42.983 11.368,42.983 12.379,41.972 19.366,41.972 JTAG1.2 ; R8.1@14.754,27.2 R8.1@14.809,27.2 ; R8.1 R8.1@14.809,27.2 ; v1(19.558,35.306) 19.539,35.306 16.599,32.366 16.599,31.947 15.69,31.038 15.69,30.295 TK1.1 15.367,27.813 15.182,27.628 15.182,27.573 R8.1@14.809,27.2 ; C17.2 25.665,6.264 26.924,7.523 v1(26.924,7.62)
Heart: R14.1 U2.50 | length 11.2
  Top Layer w0.254: U2.50 21.25,21.671 21.399,21.82 24.408,21.82 26.416,19.812 26.446,19.812 26.503,19.754 28.009,19.754 28.575,20.32 R14.1
MISO: U2.13 U3.3 U7.7 U9.7 | length 44.9
  Top Layer w0.254: U3.3 3.429,9.793 4.618,8.604 6.461,8.604 7.306,9.448 8.396,9.448 8.407,9.437 9.31,9.437 v1(10.287,10.414) ; v1(17.564,24.511) 17.564,24.236 17.831,23.969 17.831,23.159 U7.7 ; U9.7 24.13,24.631 24.638,25.139 v1(24.638,25.4)
  Int1 w0.254: v1(10.287,10.414) 11.684,10.414 13.462,12.192 20.044,12.192 20.193,12.341 20.193,20.447 17.526,23.114 17.526,24.473 v1(17.564,24.511)
  Int2 w0.254: v1(17.564,24.511) 17.948,24.194 20.398,24.194 20.843,23.749 23.281,23.749 24.372,24.84 24.372,25.134 v1(24.638,25.4)
MOSI: U2.12 U3.2 | length 4.9
  Top Layer w0.254: U3.2 4.699,9.793 5.38,9.112 6.251,9.112 7.306,10.167 8.301,10.167 U2.12
Net3,3V_2: 3,3V.2 R15.2 | length 1.6
  Top Layer w0.254: 1.306,19.738 2.856,19.738 R15.2
NetC1_2: C1.2 Q1.2 U2.23 | length 6.2
  Top Layer w0.254: C1.2 11.095,2.287 Q1.2 13.481,2.287 14.354,3.16 14.354,3.36 14.849,3.856 U2.23
NetC3_2: C3.2 Q1.1 U2.24 | length 6.1
  Top Layer w0.254: U2.24 15.637,3.932 16.208,3.36 16.208,3.16 17.081,2.287 Q1.1 17.323,2.246 C3.2
NetC11_1: C11.1 R1.1 U2.62 | length 10.1
  Top Layer w0.254: v1(10.795,23.368) 10.795,23.197 11.535,22.457 11.535,20.817 U2.62
  Bottom Layer w0.254: R1.1 10.288,16.608 C11.1 10.795,18.875 v1(10.795,23.368)
NetC12_1: C12.1 U3.6 | length 2.5
  Top Layer w0.254: C12.1 3.154,3.468 3.363,3.677 3.363,4.702 U3.6
NetC15_1: C15.1 U5.2 | length 1.8
  Top Layer w0.254: U5.2 5.629,13.003 6.009,12.623 C15.1
NetC17_1: C17.1 R2.2 R3.2 R4.1 | length 5.6
  Bottom Layer w0.254: C17.1 R3.2 27.355,3.035 R2.2 R4.1
NetCCTRL1_2: CCTRL1.2 R7.2 U6.8 | length 5.8
  Top Layer w0.254: U6.8 31.835,5.97 32.445,6.58 32.445,7.045 32.512,7.112 v1(32.512,7.239)
  Bottom Layer w0.254: CCTRL1.2 30.794,7.505 31.06,7.239 v1(32.512,7.239)
NetFehler_2: Fehler.2 R13.2 | length 1.7
  Top Layer w0.254: R13.2 Fehler.2
NetHeart_2: Heart.2 R14.2 | length 1.9
  Top Layer w0.254: R14.2 28.69,23.495 30.137,23.495 Heart.2
NetJTAG1_1: JTAG1.1 U2.57 | length 48.2
  Top Layer w0.254: U2.57 15.637,18.546 16.764,17.419 v1(16.764,13.462)
  Int1 w0.254: v1(13.462,40.386) 15.581,40.386 16.851,41.656 18.039,41.656 19.114,42.732 19.114,44.26 JTAG1.1
  Int2 w0.254: v1(13.462,40.386) 13.926,40.386 14.859,39.453 14.859,34.29 13.063,32.494 cw(c10.973,31.892) 13.097,32.362 cw(c10.973,31.892) 12.515,30.358 cw(c10.907,31.877) 12.446,30.288 12.446,28.111 12.512,28.038 13.17,27.315 13.242,27.243 14.732,25.753 14.732,23.408 14.986,23.154 14.986,18.415 16.764,16.637 v1(16.764,13.462)
NetJTAG1_3: JTAG1.3 U2.55 | length 37.3
  Top Layer w0.254: U2.55 17.237,19.293 19.05,17.48 v1(19.05,15.869)
  Int2 w0.254: JTAG1.3 16.448,44.134 16.448,41.756 16.002,41.31 16.002,32.174 cw(c14.859,31.877) 16.04,31.877 16.04,18.977 16.114,18.903 19.015,16.002 19.015,15.904 v1(19.05,15.869)
NetJTAG1_5: JTAG1.5 U2.56 | length 45.4
  Top Layer w0.254: U2.56 16.577,20.575 16.577,19.235 18.034,17.777 v1(18.034,14.351)
  Int1 w0.254: v1(18.034,14.351) 18.034,17.606
  Int2 w0.254: JTAG1.5 14.286,44.512 14.286,40.999 15.367,39.918 15.367,34.055 13.712,32.4 13.677,32.353 13.654,31.788 cw(c10.973,31.892) 12.954,30.083 12.954,29.297 13.028,28.247 15.24,26.035 15.24,23.618 15.494,23.364 15.494,18.805 18.034,16.265 v1(18.034,14.351)
NetJTAG1_9: JTAG1.9 U2.54 | length 35.7
  Top Layer w0.254: JTAG1.9 10.357,45.523 11.368,45.523 12.643,44.248 13.161,44.248 14.04,43.369 14.04,42.851 16.251,40.64 v1(17.272,40.64) ; U2.54 18.177,20.575 18.177,19.801 18.901,19.077 v1(19.064,19.077)
  Int2 w0.254: v1(17.272,40.64) 16.51,39.878 16.51,34.417 16.51,34.288 16.548,32.087 16.548,24.09 16.653,19.226 16.802,19.077 v1(19.064,19.077)
NetPWR_2: PWR.2 R6.2 | length 2.7
  Top Layer w0.254: R6.2 1.416,12.846 1.416,13.461 PWR.2
NetR3_1: R3.1 U6.5 | length 5.9
  Top Layer w0.254: v1(28.702,1.778) 28.977,1.778 29.359,2.16 U6.5
  Bottom Layer w0.254: R3.1 27.884,1.235 28.427,1.778 v1(28.702,1.778)
NetR5_1: R5.1 R8.2 TK2.1 U7.6 | length 12.7
  Top Layer w0.254: v1(13.97,22.733) 14.826,21.877 15.931,21.877 16.637,22.583 U7.6
  Bottom Layer w0.254: v1(13.97,22.733) 13.97,23.241 14.859,24.13 R8.2 14.859,25.45 15.182,25.773 16.06,25.773 16.383,26.096 TK2.1 16.706,26.612 16.706,27.156 17.045,27.495 18.805,27.495 19.177,27.123 R5.1
NetR9_1: R9.1 R11.2 TK6.1 U9.6 | length 10.1
  Top Layer w0.254: U9.6 v1(22.86,24.765)
  Bottom Layer w0.254: v1(22.86,24.765) TK6.1 23.183,26.231 23.884,26.231 24.831,27.178 R11.2 24.931,27.178 25.762,28.009 27.339,28.009 27.778,27.57 R9.1
NetTK3_2: TK3.2 TK4.2 U7.4 | length 21.8
  Top Layer w0.254: v1(13.97,29.718) 14.245,29.718 14.661,29.302 15.184,29.302 15.367,29.119 U7.4
  Bottom Layer w0.254: v1(13.97,29.718) 12.954,28.702 12.954,22.312 13.549,21.717 15.099,21.717 16.623,23.241 TK4.2 19.373,22.918 19.373,22.374 21.485,20.262 22.029,20.262 TK3.2
NetTK8_2: TK8.2 TK9.2 U9.4 | length 18.2
  Top Layer w0.254: U9.4 21.59,28.233 22.89,26.933 24.542,26.933 26.924,24.551 v1(26.924,20.77)
  Bottom Layer w0.254: TK8.2 26.268,20.955 26.522,20.701 26.855,20.701 v1(26.924,20.77) ; v1@26.924,20.701 26.924,15.494 TK9.2
Reset: JTAG1.6 U2.20 U4.1 | length 48.6
  Top Layer w0.254: v1(9.398,28.321) 9.436,28.283 11.11,28.283 U4.1 ; U2.20 12.493,5.519 12.493,7.46 v1(12.549,7.517)
  Int1 w0.254: v1(10.922,40.259) 11.898,40.259 13.041,41.402 13.843,41.402 15.367,42.926 JTAG1.6
  Int2 w0.254: v1(10.922,40.259) 12.152,40.259 13.041,39.37 14.224,39.37 14.351,39.243 14.351,36.037 10.757,32.443 10.757,29.68 v1(9.398,28.321) 9.398,26.964 9.906,26.456 9.906,23.916 9.779,23.789 9.779,12.359 12.359,9.779 12.359,7.707 v1(12.549,7.517)
RX_CAN: U2.31 U6.4 | length 9.2
  Top Layer w0.254: U2.31 21.25,2.332 22.439,1.143 24.13,1.143 25.147,2.16 U6.4
SCK: U2.11 U3.1 | length 3
  Top Layer w0.254: U3.1 5.969,10.549 6.495,11.076 U2.11
SCK_SPI: R10.2 TK7.2 | length 2.4
  Bottom Layer w0.254: TK7.2@24.892,22.733 TK7.2 25.648,22.733 26.166,22.215 R10.2
SCK_SPI_Logiklevel: R10.1 R12.2 TK7.1 U7.5 U9.5 | length 18.7
  Top Layer w0.254: U7.5 15.367,23.789 17.105,25.527 18.231,25.527 20.675,23.083 U9.5 21.59,23.69 21.149,24.131 21.149,24.705 21.299,24.855 v1(21.339,24.855)
  Bottom Layer w0.254: v1(21.339,24.855) 21.339,24.85 22.439,23.749 23.38,23.749 23.634,24.003 TK7.1 27.047,24.003 28.691,24.003 R12.2
T+1: T+1.1 U7.3 | length 3.6
  Top Layer w0.254: U7.3 16.637,30.734 T+1.1
T+2: T+2.1 U9.3 | length 3.4
  Top Layer w0.254: U9.3 22.86,30.878 23.495,31.513 T+2.1@23.495,31.877
T-1: T-1.1 TK1.2 U7.2 | length 11
  Top Layer w0.254: T-1.1 16.04,33.058 18.269,33.058 18.961,32.366 18.961,31.133 18.415,30.587 v1(18.415,30.312) ; U7.2 17.907,29.845 v1@18.394,30.332
  Bottom Layer w0.254: TK1.2 18.266,29.972 18.415,30.121 v1(18.415,30.312)
T-2: T-2.1 TK5.2 U9.2 | length 11.2
  Top Layer w0.254: T-2.1@20.574,32.004 20.705,32.135 21.721,32.135 22.644,33.058 24.346,33.058 25.051,32.353 cw(c24.811,32.275) 25.063,32.283 25.063,32.236 cw(c18.483,32.274) 24.747,30.259 v1(24.746,30.256) 24.552,30.061 24.552,29.762 24.13,29.34 U9.2
  Bottom Layer w0.254: v1(24.746,30.256) 25.021,30.256 25.432,29.845 TK5.2
TX_CAN: U2.30 U6.1 | length 7.1
  Top Layer w0.254: U2.30 20.564,5.589 20.564,6.306 20.838,6.58 22.642,6.58 23.251,5.97 U6.1
pads on no net: JTAG1.8 U1.1 U1.2 U1.3 U1.4 U1.5 U1.6 U1.7 U1.8 U1.9 U1.10 U1.11 U1.17 U1.18 U1.19 U1.20 U1.21 U1.22 U1.23 U1.24 U1.25 U1.26 U1.29 U1.31 U1.32 U2.1 U2.2 U2.3 U2.4 U2.5 U2.6 U2.7 U2.8 U2.9 U2.17 U2.18 U2.19 U2.25 U2.26 U2.27 U2.28 U2.29 U2.32 U2.33 U2.34 U2.35 U2.36 U2.37 U2.38 U2.39 U2.40 U2.41 U2.42 U2.43 U2.44 U2.45 U2.46 U2.47 U2.48 U2.49 U2.58 U2.59 U2.60 U7.8 U9.8

## Polygon pours and split planes (outlines as drawn)
GND on Top Layer "GND_L01_P000" (solid, pour order 0): 0,36.195 0,0 33.909,0 33.909,36.195
GND on Int2 "GND_L03_P003" (solid, pour order 3): 0,36.195 0,0 33.909,0 33.909,36.195
+5V on Int1 "+5V_L02_P001" (solid, pour order 1): 0,36.205 0,0.01 33.909,0.01 33.909,36.205
GND on Bottom Layer "GND_L04_P002" (solid, pour order 2): 0,36.205 0,0.01 33.909,0.01 33.909,36.205

## Other copper
Top Layer:
  pour cut-out: 0,31.14 1.778,31.14 1.778,35.966 0,35.966
  text "1" at 0.404,31.544 h1
Int1:
  pour cut-out: 0,31.14 1.778,31.14 1.778,35.966 0,35.966
  text "2" at 0.785,32.154 h1
Int2:
  pour cut-out: 0,31.115 1.778,31.115 1.778,35.941 0,35.941
  text "3" at 0.404,33.449 h1
Bottom Layer:
  pour cut-out: 0,31.115 1.778,31.115 1.778,35.941 0,35.941
  text "4" at 0.912,34.465 h1